# EAGLE board lt3652 (EAGLE 6.2)
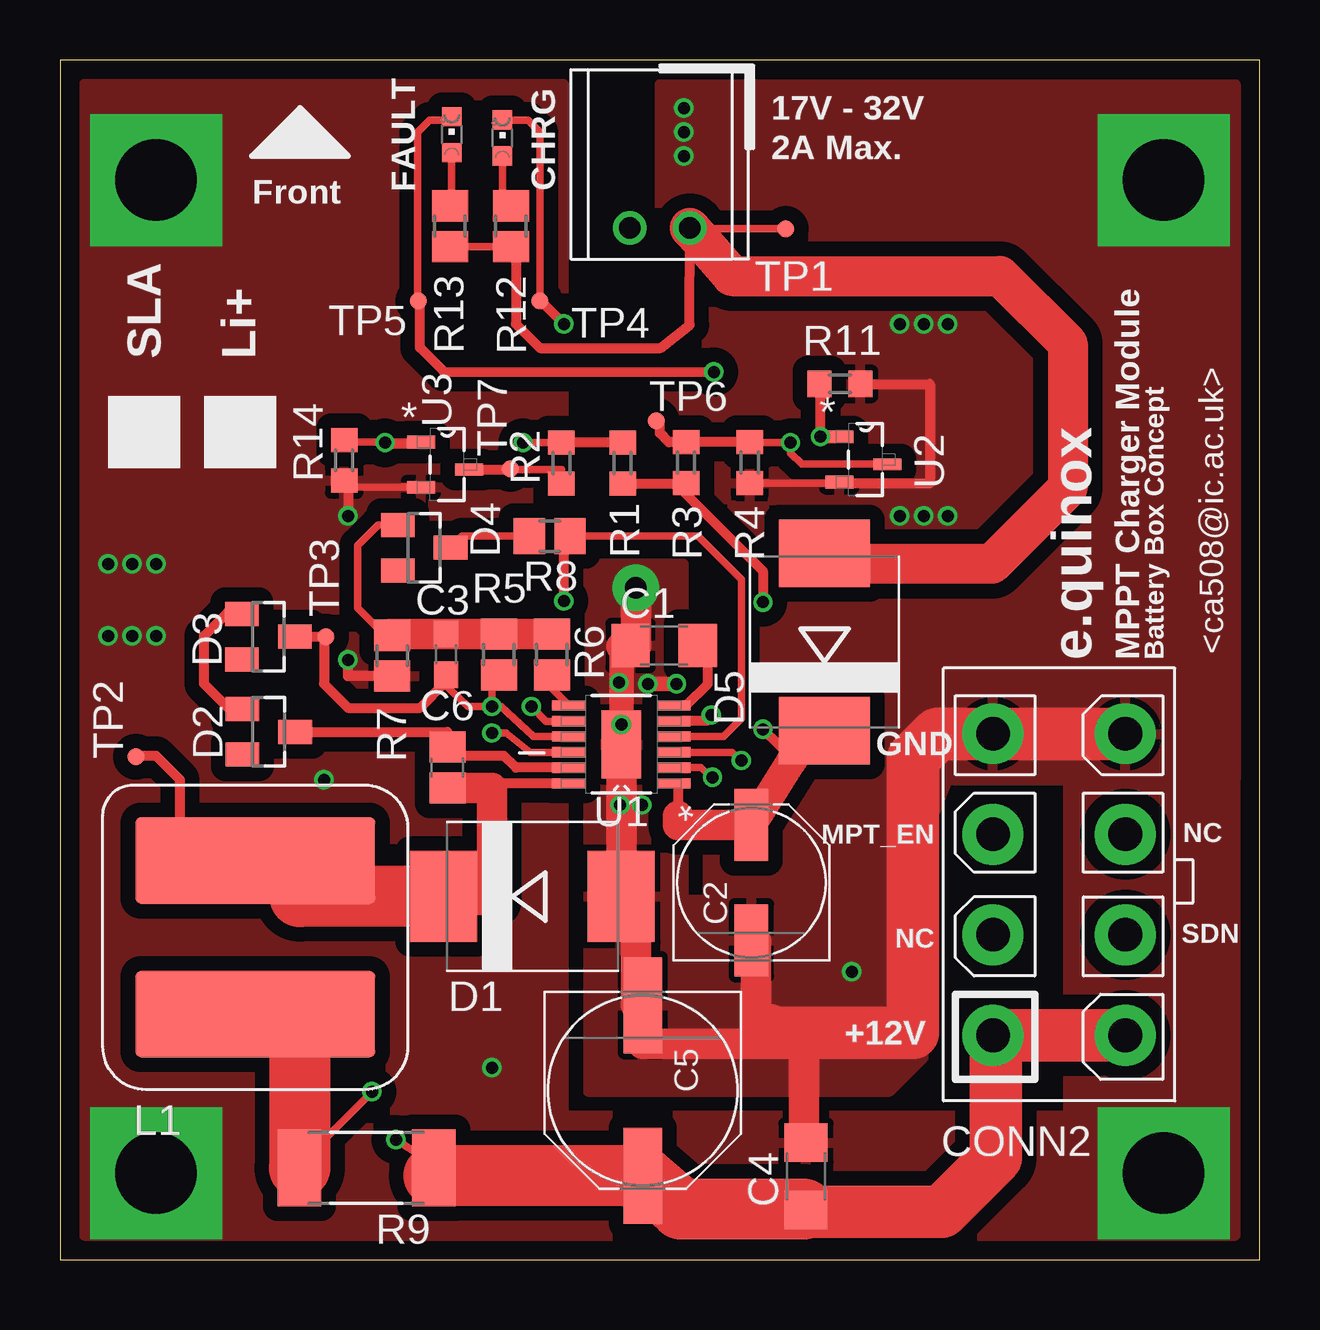
[diagram p0: board, top side]
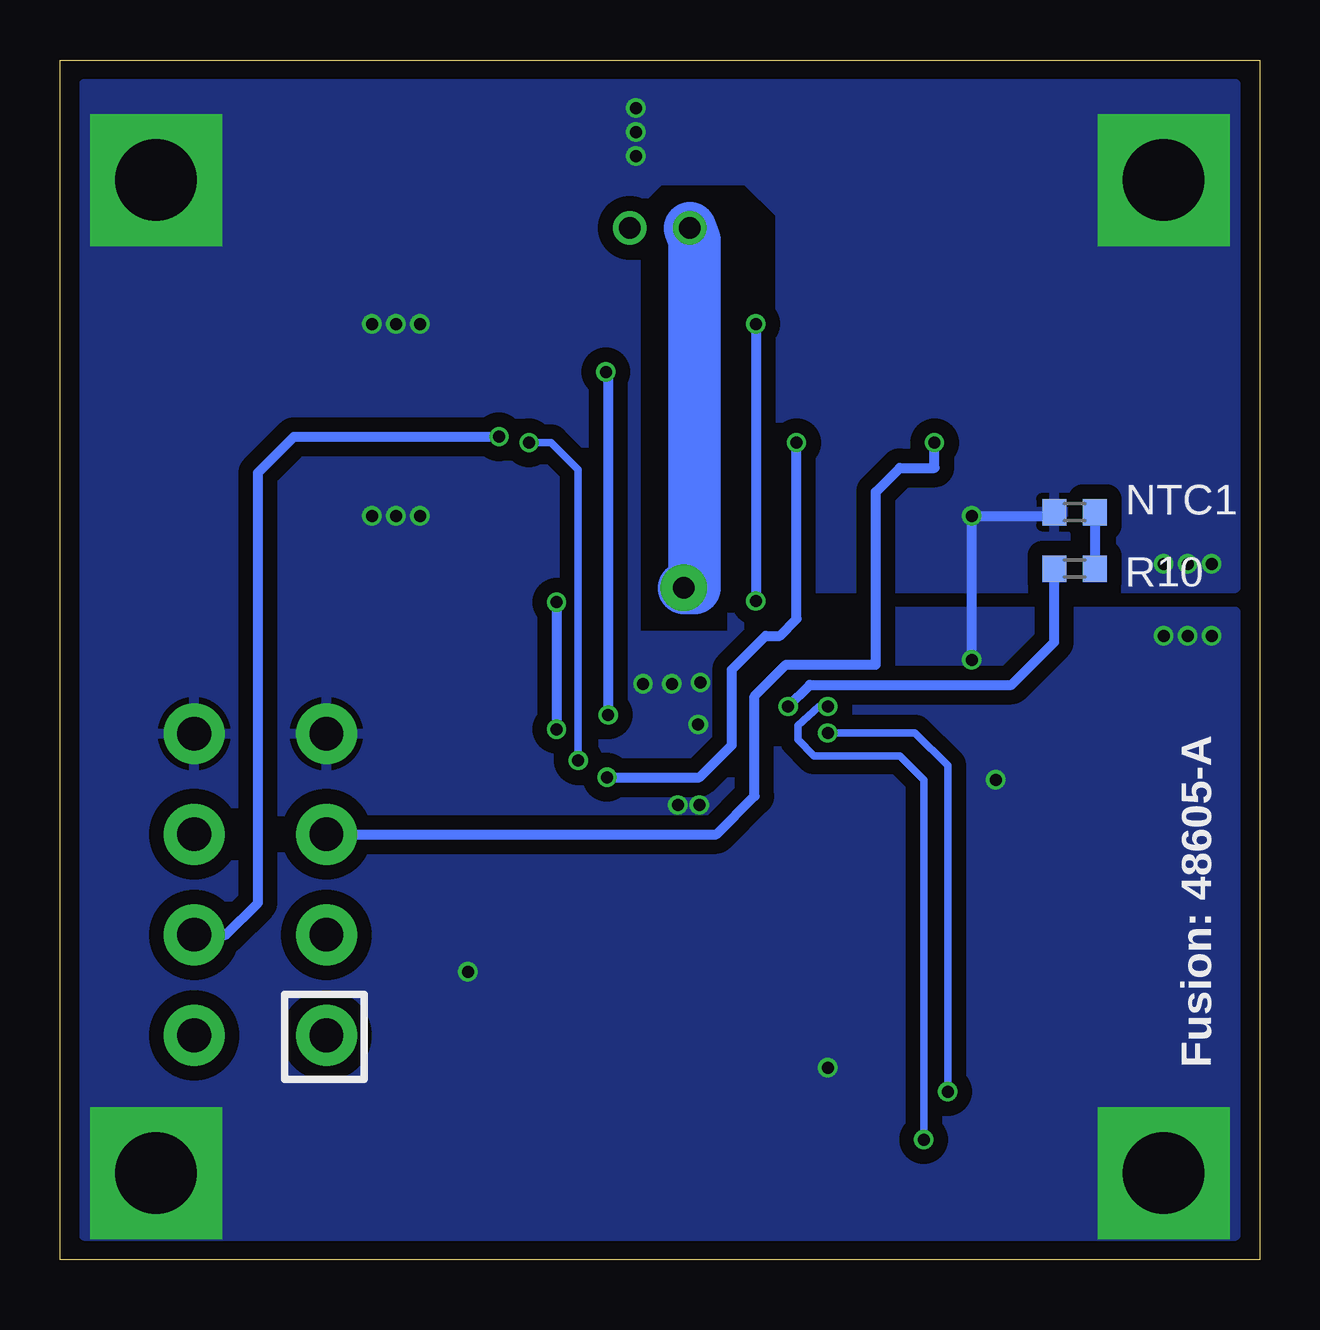
[diagram p1: board, bottom side, seen from below]

Size 50 x 50 mm. Coordinates in mm from the lower left corner, seen from the top.
Outline: 0,0 50,0 50,50 0,50 0,0
Copper layers (1*16): Top 0.035mm / dielectric 1.5mm / Bottom 0.035mm
Design rules: minimum track width 8mil, minimum drill 12mil, track to track 8mil, track to pad 8mil, pad to pad 8mil, via to via 8mil, smd to smd 0mil, copper to edge 10mil, drill to drill 10mil, minimum pad ring 10mil, minimum via ring 6mil, stop-mask expansion 2mil, vias tented up to drill 100mil, thermal gap 10mil

## Footprints (pad centres in the part's own frame; a part is rotated, then mirrored left to right if it is on the bottom)
C1206 = smd 1.6 x 1.8: 1 -1.4,0; 2 1.4,0
PANASONIC_D = smd 3 x 1.4: + 2.4,0; - -2.4,0
C0603 = smd 1.1 x 1: 1 -0.85,0; 2 0.85,0
PANASONIC_F = smd 4 x 1.6: + 3.55,0; - -3.55,0
C0805 = smd 1.3 x 1.5: 1 -0.85,0; 2 0.85,0
22-05-7025 = drill 0.9: 1 1.25,0; 2 -1.25,0
39-28-1083 = drill 1.397 pad 2.54: P$1 -6.287,2.756; P$2 -2.095,2.756; P$3 2.095,2.756; P$4 6.287,2.756; P$5 -6.287,-2.756; P$6 -2.095,-2.756; P$7 2.095,-2.756; P$8 6.287,-2.756
SMC = smd 2.8 x 3.8: A 3.7,0; C -3.7,0
SOT23 = smd 1 x 1.4: 1 -0.95,-1.1; 2 0.95,-1.1; 3 0,1.1
SDR1006 = smd 10.008 x 3.607: P$1 0,3.2; P$2 0,-3.2
CHIPLED_0603 = smd 0.8 x 0.8: A 0,-0.75; C 0,0.75
R0603 = smd 1 x 1.1: 1 -0.85,0; 2 0.85,0
R0805 = smd 1.3 x 1.5: 1 -0.85,0; 2 0.85,0
R2512 = smd 1.8 x 3.2: 1 -2.8,0; 2 2.8,0
TP07R = smd 0.7 x 0.7: TP 0,0
SOP65P490X110-13N = smd 1.397 x 0.432: 1 -2.184,1.626; 2 -2.184,0.965; 3 -2.184,0.33; 4 -2.184,-0.33; 5 -2.184,-0.965; 6 -2.184,-1.626; 7 2.184,-1.626; 8 2.184,-0.965; 9 2.184,-0.33; 10 2.184,0.33; 11 2.184,0.965; 12 2.184,1.626 | smd 1.651 x 2.845: 13 0,0
SOT95P230X110-3N = smd 1.168 x 0.533: 1 -1.092,0.94; 2 -1.092,-0.94 | smd 1.168 x 0.483: 3 0.914,-0.203

## Placement (x,y rotation side)
C1  4.7uF  [C1206]  25.18,25.59 180 top
C2  33uF  [PANASONIC_D]  28.82,15.71 90 top
C3  50pF  [C0603]  16.1,25.23 90 top
C4  10uF  [C1206]  31.09,3.47 90 top
C5  100uF  [PANASONIC_F]  24.29,7.05 270 top
C6  1uF  [C0805]  16.15,20.51 270 top
CONN1  22-05-7025  [22-05-7025]  25,43 0 top
CONN2  39-28-1083  [39-28-1083]  41.65,15.63 90 top
D1  MBRS340T3  [SMC]  19.69,15.13 0 top
D2  PMBD914  [SOT23]  8.7,22 270 top
D3  BZX84C6V2L  [SOT23]  8.69,25.96 270 top
D4  BAW56  [SOT23]  15.18,29.67 270 top
D5  MBRS340T3  [SMC]  31.87,25.74 90 top
L1  SDR1006-220ML  [SDR1006]  8.14,13.43 0 top
LED1  GREEN  [CHIPLED_0603]  18.44,46.75 0 top
LED2  RED  [CHIPLED_0603]  16.33,46.88 0 top
NTC1  10k  [R0603]  7.71,31.15 0 bottom
R1  499k  [R0603]  23.45,33.2 270 top
R2  100k  [R0603]  20.9,33.2 90 top
R3  0  [R0603]  26.1,33.22 270 top
R4  DNP  [R0603]  28.75,33.22 90 top
R5  309k  [R0805]  18.3,25.22 270 top
R6  174k  [R0805]  20.5,25.22 270 top
R7  100k  [R0805]  13.85,25.17 270 top
R8  1M  [R0805]  20.41,30.15 0 top
R9  0.06  [R2512]  12.78,3.82 180 top
R10  910  [R0603]  7.71,28.8 180 bottom
R11  2.7k  [R0603]  32.51,36.5 180 top
R12  4.7k  [R0805]  18.8,43.07 270 top
R13  4.7k  [R0805]  16.25,43.07 270 top
R14  2.7k  [R0603]  11.85,33.31 90 top
TP1  TPTP07R  [TP07R]  30.25,42.96 0 top
TP2  TPTP07R  [TP07R]  3.17,20.96 0 top
TP3  TPTP07R  [TP07R]  11.09,25.96 0 top
TP4  TPTP07R  [TP07R]  20.01,39.96 0 top
TP5  TPTP07R  [TP07R]  14.93,39.96 0 top
TP6  TPTP07R  [TP07R]  24.85,34.96 0 top
TP7  TPTP07R  [TP07R]  18.77,32.96 0 top
U1  LT3652EMSEPBF  [SOP65P490X110-13N]  23.4,21.47 180 top
U2  2N7002E  [SOT95P230X110-3N]  33.58,33.35 0 top
U3  2N7002E  [SOT95P230X110-3N]  16.14,33.13 0 top

## Library data of the parts
C1-C6 NTC1 R1-R14 = resistor
CONN1 CONN2 D2 D4 L1 = farnellparts
D1 D3 D5 = diode
LED1 LED2 = led
TP1-TP7 = testpad
U1 = farnellparts; DESCRIPTION: Power Tracking 2A Battery Charger for Solar Power; MPN: LT3652EMSE#PBF; OC_FARNELL: 1839126; OC_NEWARK: 64R8539; PACKAGE: MSOP-12; SUPPLIER: Linear Technology
U2 U3 = farnellparts; MPN: 2N7002E; OC_FARNELL: 1894721; OC_NEWARK: 55T7740; PACKAGE: SOT-3; SUPPLIER: NXP

## Nets
0V: C1.2 C2.- C4.2 C5.- CONN1.2 CONN2.P$4 CONN2.P$8 D1.A NTC1.1 R4.1 R7.2 R11.1 R14.1 U1.13 U2.2 U3.2
!CHRG: LED1.C R8.2 TP4.TP U1.4
!MPPT!: R2.1 TP7.TP U3.3
!SHDN!: R3.1 R4.2 TP6.TP U1.3 U2.3
+3V3: CONN2.P$2
+12V: C3.1 C4.1 C5.+ CONN2.P$1 CONN2.P$5 D3.3 R5.2 R9.1 TP3.TP U1.9
CHG_VIN: C2.+ D5.C R1.2 R3.2 U1.1
MPPT_EN: CONN2.P$3 R14.2 U3.1
N$1: R1.1 R2.2 U1.2
N$2: CONN2.P$7
N$3: C6.2 D1.C L1.P$1 TP2.TP U1.12
N$4: C1.1 U1.6
N$5: C6.1 D2.3 U1.11
N$6: R10.2 U1.8
N$7: D2.1 D3.1
N$10: L1.P$2 R9.2 U1.10
N$11: C3.2 D4.1 R5.1 R6.1 R7.1
N$12: D4.3 R8.1
N$14: LED2.C TP5.TP U1.5
N$16: NTC1.2 R10.1
N$17: LED1.A R12.1
N$18: LED2.A R13.1
SHDN: CONN2.P$6 R11.2 U2.1
VCC: CONN1.1 D5.A R12.2 R13.2 TP1.TP
VFB: R6.2 U1.7

## Tracks (layer width: path | path; a pad name or v marks a point on that pad's centre or on a via)
0V  (via drill 0.5, 0.9 pad 1.93, 3.4 pad 5.5)
  Top 0.305: R4.1 32.49,32.37 U2.2 | U3.2 11.85,32.19 R14.1
  Top 0.406: R7.2 12,24.32 v12,25 | 11.85,32.19 12,32.19 v12,31 | 24,15 23,15 23,15.13 D1.A | R11.1 36.25,36.5 36.25,32.35 32.49,32.35 U2.2 | 29.6,9.45 29,9.45 29,9 | C1.2 23.78,25.55 23.9,25.55 24,25.55
  Top 0.61: v24.5,24 v25.7,24
  Top 1.016: U1.13 v23.4,22.3 23.4,25.55
  Top 1.27: C4.2 31,4.87 31,9 29,9 | 29,9 24.29,9 C5.- 24,10.6 24,15 | D1.A U1.13 | C2.- 29,13.31 29,9 | 23.4,25.55 23.9,25.55 | 24,25.55 v24,28
  Top 2.184: CONN2.P$8 CONN2.P$4 36.57,21.92 35.55,20.89 35.55,9.45 29.6,9.45 29.6,9.55
  Bottom 0.406: v12,25 v12,31 8.56,31 NTC1.1
  Bottom 2.184: v24,28 23.55,28 23.55,42.5 CONN1.2
  other vias: 35,39 37,31 35,31 36,31 37,39 36,39 4,3.6 4,45 46,45 46,3.6 2,29 3,29 4,29 4,26 3,26 2,26 18,8 33,12 11,20 26,48 26,47 26,46 23.3,24.05 23.35,18.95 24.25,18.95
  pour Top (isolate 0.61): 36,8.41 36,18.59 32.59,15 26,15 26,29 22,29 22,7 34.59,7
  pour Top (isolate 0.61): 25,49 49,49 49,20 37,20 35,15 27,15 27,30 25,30
  pour Top (isolate 0.61): 1,49 1,1 49,1 49,24 37,24 37,20 42,20 42,6 21,6 21,49
  pour Bottom (isolate 0.61): 1,49 49,49 49,1 1,1 1,27 22,27 22,26 26,26 26,44 25,45 21.41,45 20,43.59 20,28 1,28
!CHRG  (via drill 0.5)
  Top 0.254: 25.6,21.8 U1.4 | 25.5,21.8 U1.4 | U1.4 | 21,30 21.26,30 R8.2
  Top 0.305: R8.2 26.59,30.15 28.4,28.34 28.4,22.55 27.65,21.8 25.6,21.8 | LED1.C 19.51,47.5 20.01,47 TP4.TP
  Top 0.406: TP4.TP 20.04,39.96 v21,39 | v21,27.45 21,30
  Bottom 0.406: v21,39 v21,27.45
!MPPT!
  Top 0.305: U3.3 20.9,32.93 R2.1
  Top 0.406: U3.3 18.77,32.93 TP7.TP
!SHDN!  (via drill 0.5)
  Top 0.254: TP6.TP 25,34.96 25,35
  Top 0.305: U1.3 28,21.14 v28.4,20.8 | R4.2 28.75,34.05 v30.45,34.05 30.45,33.62 30.92,33.15 U2.3
  Top 0.406: R4.2 R3.1 25.37,34.07 25,34.44 25,35
  Bottom 0.305: v30.45,34.05 29.52,34.05 28.4,32.93 v28.4,20.8
+12V  (via drill 0.5)
  Top 0.254: C4.1 31,2.07 31,2
  Top 0.305: U1.9 19.74,21.8 18.39,23.05 v18,23.05 | v14,5 15.58,4 R9.1 | v18,23.05 18,24 | C3.1 16,24.28 16,24 17,23.05 v18,23.05
  Top 0.406: D3.3 11,25.96 | 11,25.96 11,24 12,23 15,23 16.1,24.1 C3.1 | 18,24 18.3,24 R5.2 | TP3.TP 11,25.96
  Top 1.27: 15.58,3.5 R9.1 | 31,2.11 31,2
  Top 2.184: CONN2.P$5 39,9.34 | CONN2.P$1 39,9.34 | 39,9.34 39,4.24 36.76,2 31.09,2 C4.1
  Top 2.54: 31,2.11 25.88,2.11 C5.+ 15.58,3.5
  Bottom 0.305: v18,23.05 18.36,23.05 19.25,22.27 19.25,21.68 18.57,21 15,21 14,20 v14,5
CHG_VIN  (via drill 0.5)
  Top 0.406: U1.1 25.75,19.84 25.75,18.5 | v29.3,22.1 29.35,22.05 30.46,21 30.46,20.71 | R1.2 26.1,32.35 R3.2 | R3.2 26.13,32.37 | R3.2 26,32.37 26,32 29.3,28.7 v29.3,27.4
  Top 1.27: 25.75,18.5 25.75,18.11 C2.+ 30.46,20.71 30.82,21.29 D5.C
  Bottom 0.406: v29.3,27.4 v29.3,22.1
MPPT_EN  (via drill 0.5)
  Top 0.305: U3.1 11.85,34.07 R14.2
  Top 0.406: U3.1 15,34.07 15,34 13.55,34 v13.55,34.05
  Bottom 0.406: CONN2.P$3 22.64,17.73 21.05,19.32 21.05,23.48 19.73,24.8 16,24.8 16,32 15,33 13.55,33 v13.55,34.05 13.55,34.07
N$1  (via drill 0.5)
  Top 0.305: U1.2 26.7,20.5 v27.2,20.1 | v19.3,34.05 R2.2
  Top 0.406: R1.1 R2.2
  Bottom 0.406: v27.2,20.1 23.34,20.1 22,21.45 22,24.59 20.59,26 20,26 19.3,26.7 v19.3,34.05
N$3
  Top 0.406: U1.12 18,19.84 | TP2.TP 3.17,21 4,21 5,20 5,16.63 L1.P$1 10,16.63 10,17
  Top 0.61: 18,19.84 18,19
  Top 1.27: 10,15.13 10,17 | D1.C 15.99,15 18,15 18,19 18,19.66 C6.2
  Top 2.54: D1.C 10,15.13
N$4
  Top 0.406: U1.6 26.1,23.1 27,24 27,25 26.58,25 C1.1
N$5
  Top 0.406: U1.11 19,20.5 18.5,21 16,21 16,21.36 C6.1 16.15,22 D2.3
N$6  (via drill 0.5)
  Top 0.305: U1.8 20.27,22.43 v19.65,23.05
  Bottom 0.406: v19.65,23.05 18.75,23.95 10.34,23.95 8.56,25.73 R10.2
N$7
  Top 0.406: D2.1 7.05,22.95 6,24 6,26 7,27 7.59,27 D3.1
N$10  (via drill 0.5)
  Top 0.305: U1.10 19.61,21.14 18.6,21.95 v18,21.95 | v13,7 10,4
  Top 2.54: L1.P$2 9.98,10.23 R9.2 10,3.82 10,4
  Bottom 0.305: v18,21.95 14.36,21.95 13,20.59 v13,7
N$11
  Top 0.305: D4.1 13.26,30.62 12.4,29.76 12.4,27.15 13.65,25.9 13.85,25.9 R7.1
  Top 1.27: R6.1 R5.1 C3.2 13.75,26.08 R7.1
N$12
  Top 0.305: R8.1 16.76,30.15 D4.3
N$14  (via drill 0.5)
  Top 0.254: TP5.TP 15,39.96 15,40
  Top 0.305: TP5.TP 14.9,39.96 14.9,46.99 15.41,47.5 16.33,47.5 LED2.C
  Top 0.406: v27.25,37 16.01,37.01 16,37.01 15,38.01 15,40 | v27.15,22.7 27.2,22.7 26.95,22.45 U1.5
  Bottom 0.406: v27.25,37 27.15,37 v27.15,22.7
N$16
  Bottom 0.406: NTC1.2 R10.1
N$17
  Top 0.305: R12.1 18.44,43.92 LED1.A
N$18
  Top 0.305: R13.1 16.33,43.92 LED2.A
SHDN  (via drill 0.5)
  Top 0.254: R11.2 31.7,36.5 | 31.75,36.5 31.7,36.5 | 31.7,36.5 31.7,36.55 | 31.7,36 32,36 32,36.4 31.7,36.4
  Top 0.406: 31.7,36.55 31.7,36.4 | U2.1 v31.7,34.29 v31.7,34.3 31.7,36
  Bottom 0.254: v31.7,34.3 v31.7,34.29
  Bottom 0.406: CONN2.P$6 43.08,13.53 41.75,14.87 41.75,32.8 40.25,34.3 v31.7,34.3
VCC
  Top 0.305: R13.2 R12.2 | TP1.TP 26.04,42.96 CONN1.1
  Top 0.406: R12.2 19,42.22 19,39 20,38 25.04,38 26.24,38.95 CONN1.1
  Top 1.676: CONN1.1 26.3,42.95 28,41 39.17,41 42,38.17 42,32.16 38.84,29 31.87,29 D5.A
VFB
  Top 0.305: U1.7 20.49,23.83 R6.2

## Text on the board
tPlace: SLA | Li+
tNames: FAULT | 17V - 32V | 2A Max. | CHRG | Front | e.quinox | MPPT Charger Module | Battery Box Concept | <ca508@ic.ac.uk> | GND | MPT_EN | NC | NC | SDN | +12V
bNames: Fusion: 48605-A